# EAGLE board Debug board (EAGLE 8.0.1)
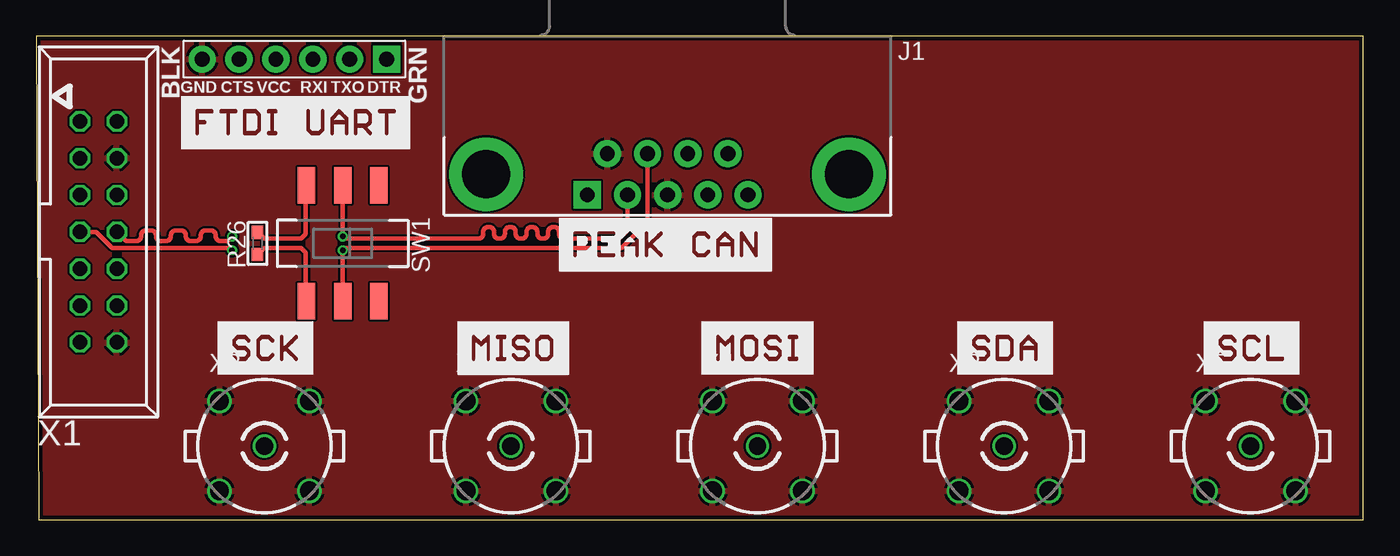
[diagram p0: board, top side]
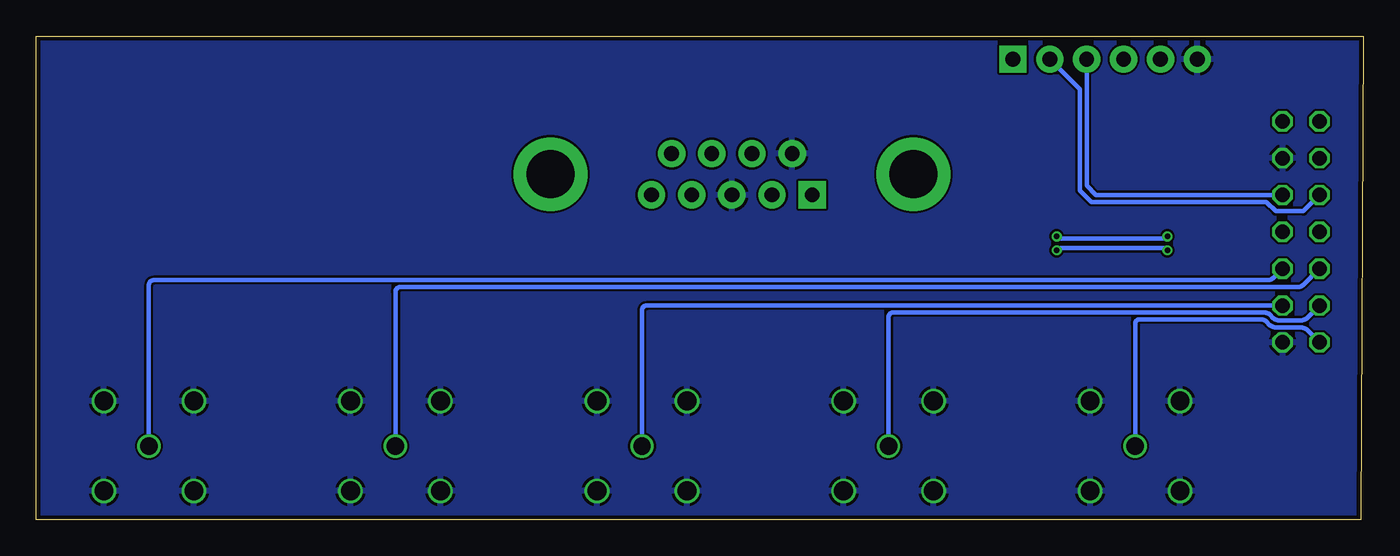
[diagram p1: board, bottom side, seen from below]

Size 91.42 x 33.32 mm. Coordinates in mm from the lower left corner, seen from the top.
Outline: 0.16,0 91.42,0 91.42,33.32 0,33.32 0.16,0
Copper layers (1*16): Top 0.035mm / dielectric 1.5mm / Bottom 0.035mm
Design rules "PCB-POOL Standard": minimum track width 0.15mm, minimum drill 0.3mm, track to track 0.15mm, track to pad 0.15mm, pad to pad 0.15mm, via to via 0.15mm, smd to smd 0.15mm, copper to edge 0.3mm, drill to drill 0.2mm, minimum pad ring 0.2mm, minimum via ring 0.15mm, stop-mask expansion 0.075mm, vias tented up to drill 0mil, thermal gap 0.2mm

## Footprints (pad centres in the part's own frame; a part is rotated, then mirrored left to right if it is on the bottom)
DB9 = drill 1.016 pad 1.88 square: 1 -5.54,-1.42 | drill 1.016 pad 1.88: 2 -2.77,-1.42; 3 0,-1.42; 4 2.77,-1.42; 5 5.54,-1.42; 6 -4.15,1.42; 7 -1.38,1.42; 8 1.38,1.42; 9 4.15,1.42 | drill 3.302 pad 5.08: G1 -12.5,0; G2 12.5,0
FTDI_DEVICE_SIDE = drill 1.016 pad 1.88 square: P$1 -6.35,0 | drill 1.016 pad 1.88: P$2 -3.81,0; P$3 -1.27,0; P$4 1.27,0; P$5 3.81,0; P$6 6.35,0
_0603 = smd 0.9 x 0.8: 1 -0.762,0; 2 0.762,0
DPDT_SMT_JS202011SCQN = smd 1.2 x 2.5: P$1 -2.5,-4; P$2 0,-4; P$3 2.5,-4; P$4 2.5,4; P$5 0,4; P$6 -2.5,4
057-014-1 = drill 1 octagon: 1 -7.62,-1.27; 2 -7.62,1.27; 3 -5.08,-1.27; 4 -5.08,1.27; 5 -2.54,-1.27; 6 -2.54,1.27; 7 0,-1.27; 8 0,1.27; 9 2.54,-1.27; 10 2.54,1.27; 11 5.08,-1.27; 12 5.08,1.27; 13 7.62,-1.27; 14 7.62,1.27
B35N61 = drill 1.2: 1 0,0 | drill 1.3: 2 3.099,3.099; 3 -3.099,3.099; 4 -3.099,-3.099; 5 3.099,-3.099

## Placement (x,y rotation side)
J1  [DB9]  43.5,23.81 0 top
J4  FTDI_DEVICE  [FTDI_DEVICE_SIDE]  17.78,31.75 180 top
R26  60  [_0603]  15.24,19.05 270 top
SW1  [DPDT_SMT_JS202011SCQN]  21.11,19.05 180 top
X1  057-014-1  [057-014-1]  4.29,19.84 270 top
X2  BN35N61  [B35N61]  66.67,5.08 0 top
X3  BN35N61  [B35N61]  15.72,5.08 0 top
X4  BN35N61  [B35N61]  49.69,5.08 0 top
X5  BN35N61  [B35N61]  83.66,5.08 0 top
X6  BN35N61  [B35N61]  32.7,5.08 0 top

## Library data of the parts
J1 = SparkFun-Connectors; PROD_ID: CONN-08194
J4 = SparkFun-Connectors
R26 SW1 = microbuilder
X1 = con-panduit
X2-X6 = con-coax; OC_FARNELL: unknown; OC_NEWARK: unknown

## Nets
3.3V: X1.2
5.0V: X1.1
12V: X1.3
CANH: J1.7 SW1.P$5 X1.7
CANL: J1.2 SW1.P$2 X1.8
DBG_RX: J4.P$3 X1.6
DBG_TX: J4.P$2 X1.5
GND: J1.3 J1.6 J4.P$6 X1.4 X1.14 X2.2 X2.3 X2.4 X2.5 X3.2 X3.3 X3.4 X3.5 X4.2 X4.3 X4.4 X4.5 X5.2 X5.3 X5.4 X5.5 X6.2 X6.3 X6.4 X6.5
MISO: X1.12 X4.1
MOSI: X1.11 X6.1
N$5: R26.2 SW1.P$4
N$8: R26.1 SW1.P$3
SCK: X1.13 X3.1
SCL: X1.10 X5.1
SDA: X1.9 X2.1

## Tracks (layer width: path | path; a pad name or v marks a point on that pad's centre or on a via)
CANH  (via drill 0.38)
  Top 0.305: SW1.P$5 v21.11,18.57 21.27,18.73 40.32,18.73 42.12,20.53 J1.7 | v13.49,18.57 13.33,18.73 5.24,18.73 4.13,19.84 X1.7
  Bottom 0.305: v21.11,18.57 20.95,18.73 13.65,18.73 v13.49,18.57
CANL  (via drill 0.38)
  Top 0.305: SW1.P$2 v21.11,19.53 21.27,19.37 30.45,19.37 arc90 30.79,19.71 30.79,19.84 arc-90 31.13,20.18 31.2,20.18 arc-90 31.54,19.84 31.54,19.71 arc90 31.88,19.37 31.94,19.37 arc90 32.28,19.71 32.28,19.84 arc-90 32.62,20.18 32.69,20.18 arc-90 33.03,19.84 33.03,19.71 arc90 33.37,19.37 33.44,19.37 arc90 33.78,19.71 33.78,19.84 arc-90 34.12,20.18 34.18,20.18 arc-90 34.52,19.84 34.52,19.71 arc90 34.86,19.37 34.93,19.37 arc90 35.27,19.71 35.27,19.84 arc-90 35.61,20.18 35.67,20.18 arc-90 36.01,19.84 36.01,19.71 arc90 36.35,19.37 40.16,19.37 40.73,19.93 J1.2 | v13.49,19.53 13.18,19.21 12.7,19.21 arc-90 12.36,19.55 12.36,19.61 arc90 12.02,19.95 11.67,19.95 arc90 11.33,19.61 11.33,19.55 arc-90 10.99,19.21 10.64,19.21 arc-90 10.3,19.55 10.3,19.61 arc90 9.96,19.95 9.61,19.95 arc90 9.27,19.61 9.27,19.55 arc-90 8.94,19.21 8.59,19.21 arc-90 8.25,19.55 8.25,19.61 arc90 7.91,19.95 7.56,19.95 arc90 7.22,19.61 7.22,19.55 arc-90 6.88,19.21 6.19,19.21 X1.8
  Bottom 0.305: v21.11,19.53 20.95,19.37 13.65,19.37 v13.49,19.53
DBG_RX
  Bottom 0.305: X1.6 18.41,22.38 19.05,23.02 J4.P$3
DBG_TX
  Bottom 0.305: X1.5 4.13,21.27 6.03,21.27 6.67,21.91 18.73,21.91 19.53,22.7 19.53,29.69 J4.P$2
GND
  pour Top: 0.16,0 91.44,0 91.44,33.34 0.16,33.34
  pour Bottom: 0.16,0 91.44,0 91.44,33.34 0.16,33.34
MISO
  Bottom 0.305: X1.12 49.37,14.76 arc-90 49.69,14.45 X4.1
MOSI
  Bottom 0.305: X1.11 3.86,13.92 arc45 4.31,13.73 5.77,13.73 arc45 6.22,13.92 6.4,14.1 arc-45 6.85,14.29 32.38,14.29 arc-90 32.7,13.97 X6.1
N$5
  Top 0.305: R26.2 15.68,18.73 18.26,18.73 18.57,18.41 18.57,15.09 SW1.P$4
N$8
  Top 0.305: R26.1 15.68,19.37 18.26,19.37 18.57,19.69 18.57,23.01 SW1.P$3
SCK
  Bottom 0.305: X1.13 3.86,13.07 arc-45 4.31,13.26 6.01,13.26 arc45 6.46,13.44 6.64,13.62 arc-45 7.09,13.81 15.4,13.81 arc-90 15.72,13.49 X3.1
SCL
  Bottom 0.305: X1.10 6.16,16.7 arc45 6.61,16.51 83.34,16.51 arc-90 83.66,16.19 X5.1
SDA
  Bottom 0.305: X1.9 4.1,16.22 arc45 4.55,16.03 66.36,16.03 arc-90 66.67,15.72 X2.1